# EAGLE board serra1 (EAGLE 7.5.0)
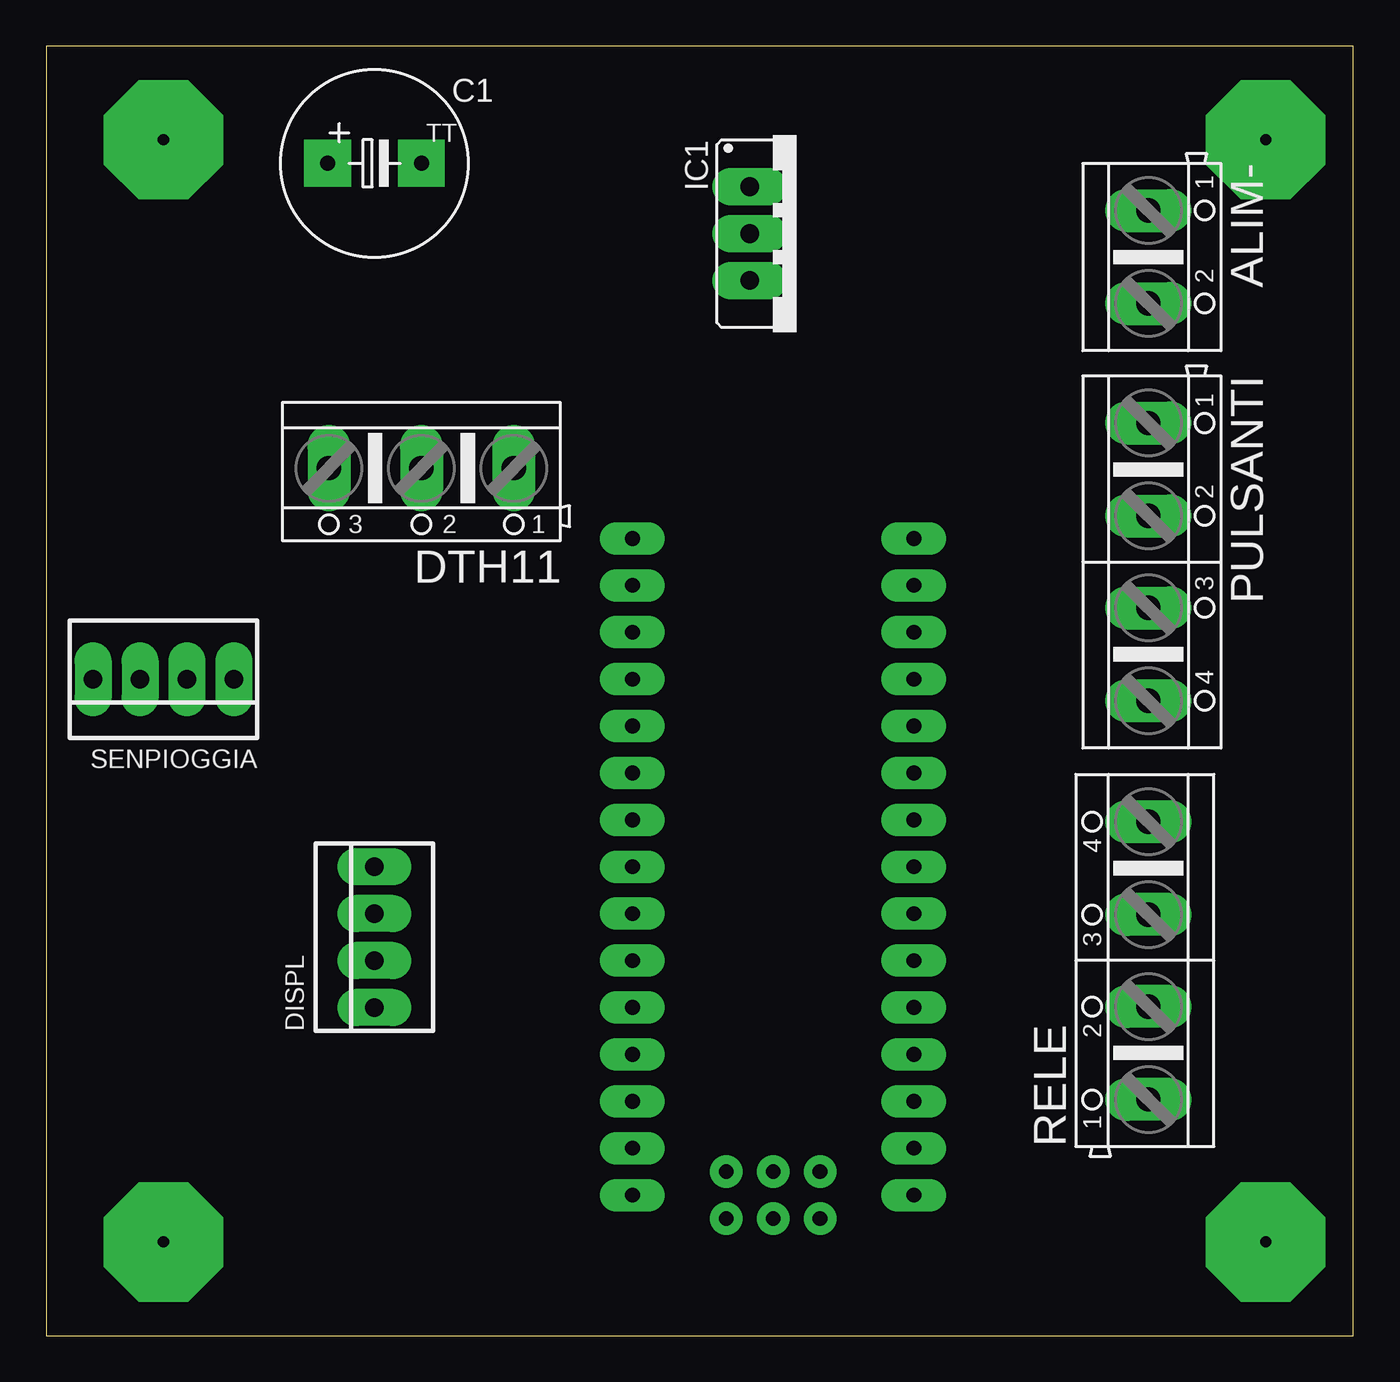
[diagram p0: board, top side]
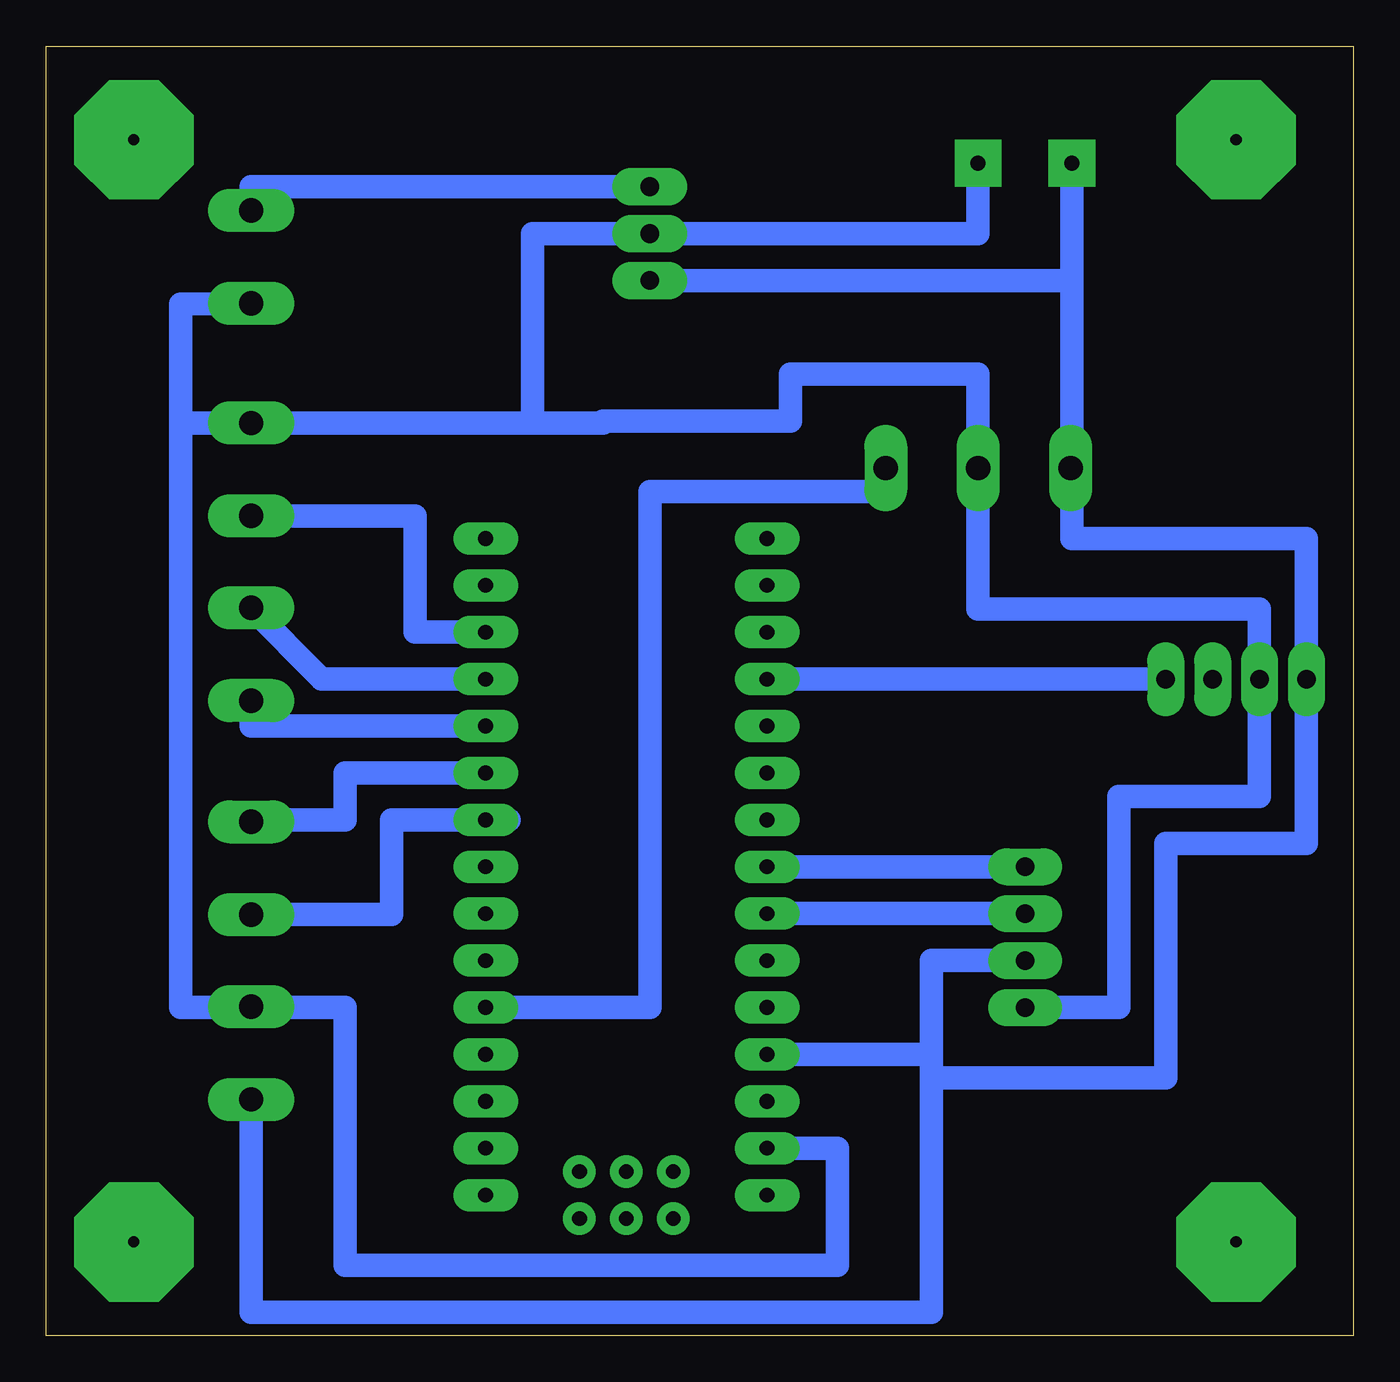
[diagram p1: board, bottom side, seen from below]

Size 70.79 x 69.84 mm. Coordinates in mm from the lower left corner, seen from the top.
Outline: 0,0 70.79,0 70.79,69.84 0,69.84 0,0
Copper layers (1*16): Top 0.035mm / dielectric 1.5mm / Bottom 0.035mm
Design rules "default *": minimum track width 10mil, minimum drill 24mil, track to track 8mil, track to pad 8mil, pad to pad 8mil, via to via 8mil, smd to smd 8mil, copper to edge 40mil, drill to drill 8mil, minimum pad ring 10mil, minimum via ring 8mil, stop-mask expansion 4mil, vias tented up to drill 0mil, thermal gap 10mil

## Footprints (pad centres in the part's own frame; a part is rotated, then mirrored left to right if it is on the bottom)
AK500/2 = drill 1.321 long: 1 -2.515,0; 2 2.515,0
TT5D10 = drill 0.813: + -2.54,0 | drill 0.813 octagon: - 2.54,0
22-23-2041 = drill 1 long: 1 -3.81,0; 2 -1.27,0; 3 1.27,0; 4 3.81,0
AK500/3 = drill 1.321 long: 1 -5.004,0; 2 0,0; 3 5.004,0
78XXS = drill 1.016 long: GND 0,-2.54; IN -2.54,-2.54; OUT 2.54,-2.54
AK500/4 = drill 1.321 long: 1 -7.518,0; 2 -2.489,0; 3 2.489,0; 4 7.518,0
NANO = drill 0.8 long: 3.3V -10.16,24.13; 5V -10.16,-1.27; A0 -10.16,19.05; A1 -10.16,16.51; A2 -10.16,13.97; A3 -10.16,11.43; A4 -10.16,8.89; A5 -10.16,6.35; A6 -10.16,3.81; A7 -10.16,1.27; AREF -10.16,21.59; D2 5.08,1.27; D3 5.08,3.81; D4 5.08,6.35; D5 5.08,8.89; D6 5.08,11.43; D7 5.08,13.97; D8 5.08,16.51; D9 5.08,19.05; D10 5.08,21.59; D11 5.08,24.13; D12 5.08,26.67; D13 -10.16,26.67; GND -10.16,-6.35; GND1 5.08,-1.27; RAW -10.16,-8.89; RST -10.16,-3.81; RST1 5.08,-3.81; RX1 5.08,-6.35; TX0 5.08,-8.89 | drill 0.8: ICSP1 -5.08,-10.16; ICSP2 -5.08,-7.62; ICSP3 -2.54,-10.16; ICSP4 -2.54,-7.62; ICSP5 0,-10.16; ICSP6 0,-7.62

## Placement (x,y rotation side)
ALIM-  [AK500/2]  59.69,58.42 270 top
C1  [TT5D10]  17.78,63.5 0 top
DISPL  22-23-2041  [22-23-2041]  17.78,21.59 90 top
DTH11  [AK500/3]  20.32,46.99 180 top
IC1  [78XXS]  40.64,59.69 270 top
PULSANTI  [AK500/4]  59.69,41.91 270 top
RELE  [AK500/4]  59.69,20.32 90 top
SENPIOGGIA  22-23-2041  [22-23-2041]  6.35,35.56 180 top
U$1  NANO  [NANO]  41.91,16.51 0 top

## Library data of the parts
ALIM- DTH11 RELE = con-pcb5mm; OC_FARNELL: unknown; OC_NEWARK: unknown
C1 = resistor
DISPL SENPIOGGIA = con-molex; MF: MOLEX; MPN: 22-23-2041; OC_FARNELL: 1462920; OC_NEWARK: 38C0355
IC1 = v-reg
PULSANTI = con-ptr500; OC_FARNELL: unknown; OC_NEWARK: unknown
U$1 = Arduino-clone

## Nets
DTH11: C1.+ DISPL.2 DTH11.3 IC1.OUT RELE.1 SENPIOGGIA.4 U$1.5V
N$1: ALIM-.1 IC1.IN
N$2: SENPIOGGIA.1 U$1.A0
N$3: RELE.4 U$1.D7
N$4: DISPL.3 U$1.A5
N$5: PULSANTI.2 U$1.D10
N$6: RELE.3 U$1.D6
N$7: DISPL.4 U$1.A4
N$8: DTH11.1 U$1.D2
N$10: PULSANTI.4 U$1.D8
N$12: PULSANTI.3 U$1.D9
N$14: ALIM-.2 C1.- DISPL.1 DTH11.2 IC1.GND PULSANTI.1 RELE.2 SENPIOGGIA.3 U$1.GND

## Tracks (layer width: path | path; a pad name or v marks a point on that pad's centre or on a via)
DTH11
  Bottom 1.27: 60.96,12.7 RELE.1 59.69,1.27 22.86,1.27 22.86,13.97 | 22.86,15.24 22.86,20.32 DISPL.2 | 22.86,13.97 22.86,15.24 | 22.86,15.24 U$1.5V | DTH11.3 15.24,48.26 | 15.24,48.26 15.24,57.15 | C1.+ 15.24,57.15 | 15.24,57.15 IC1.OUT | 15.24,48.26 15.24,43.18 2.54,43.18 SENPIOGGIA.4 2.54,26.67 10.16,26.67 10.16,13.97 22.86,13.97
N$1
  Bottom 1.27: IC1.IN 59.69,62.23 ALIM-.1
N$2
  Bottom 1.27: SENPIOGGIA.1 U$1.A0
N$3
  Bottom 1.27: RELE.4 60.96,27.94 54.61,27.94 54.61,30.48 U$1.D7
N$4
  Bottom 1.27: DISPL.3 U$1.A5
N$5
  Bottom 1.27: PULSANTI.2 50.8,44.4 50.8,38.1 U$1.D10
N$6
  Bottom 1.27: RELE.3 52.07,22.81 52.07,27.94 U$1.D6 45.72,27.94
N$7
  Bottom 1.27: DISPL.4 U$1.A4
N$8
  Bottom 1.27: U$1.D2 38.1,17.78 38.1,45.72 25.4,45.72 DTH11.1
N$10
  Bottom 1.27: U$1.D8 59.69,33.02 PULSANTI.4
N$12
  Bottom 1.27: PULSANTI.3 55.88,35.56 U$1.D9
N$14
  Bottom 1.27: 63.5,49.43 PULSANTI.1 44.45,49.43 | 63.5,49.43 63.5,17.78 | U$1.GND 27.94,10.16 27.94,3.81 54.61,3.81 54.61,17.78 63.5,17.78 | 63.5,17.78 RELE.2 | DISPL.1 12.7,17.78 12.7,29.21 5.08,29.21 SENPIOGGIA.3 5.08,39.37 20.32,39.37 DTH11.2 20.32,52.07 30.48,52.07 30.48,49.53 40.64,49.53 40.64,49.43 44.45,49.43 | ALIM-.2 63.5,55.88 63.5,49.43 | 44.45,49.43 44.45,59.69 IC1.GND 20.32,59.69 C1.-
S$1  (via drill 0.6 pad 2.54)
  other vias: 15.24,63.5
S$2  (via drill 0.6 pad 2.54)
  other vias: 20.32,63.5
S$3  (via drill 0.6 pad 6.45)
  other vias: 6.35,64.77
S$4  (via drill 0.6 pad 6.45)
  other vias: 66.04,64.77
S$5  (via drill 0.6 pad 6.45)
  other vias: 66.04,5.08
S$6  (via drill 0.6 pad 6.45)
  other vias: 6.35,5.08